# EAGLE board SP+SPIDER (EAGLE 9.4.2)
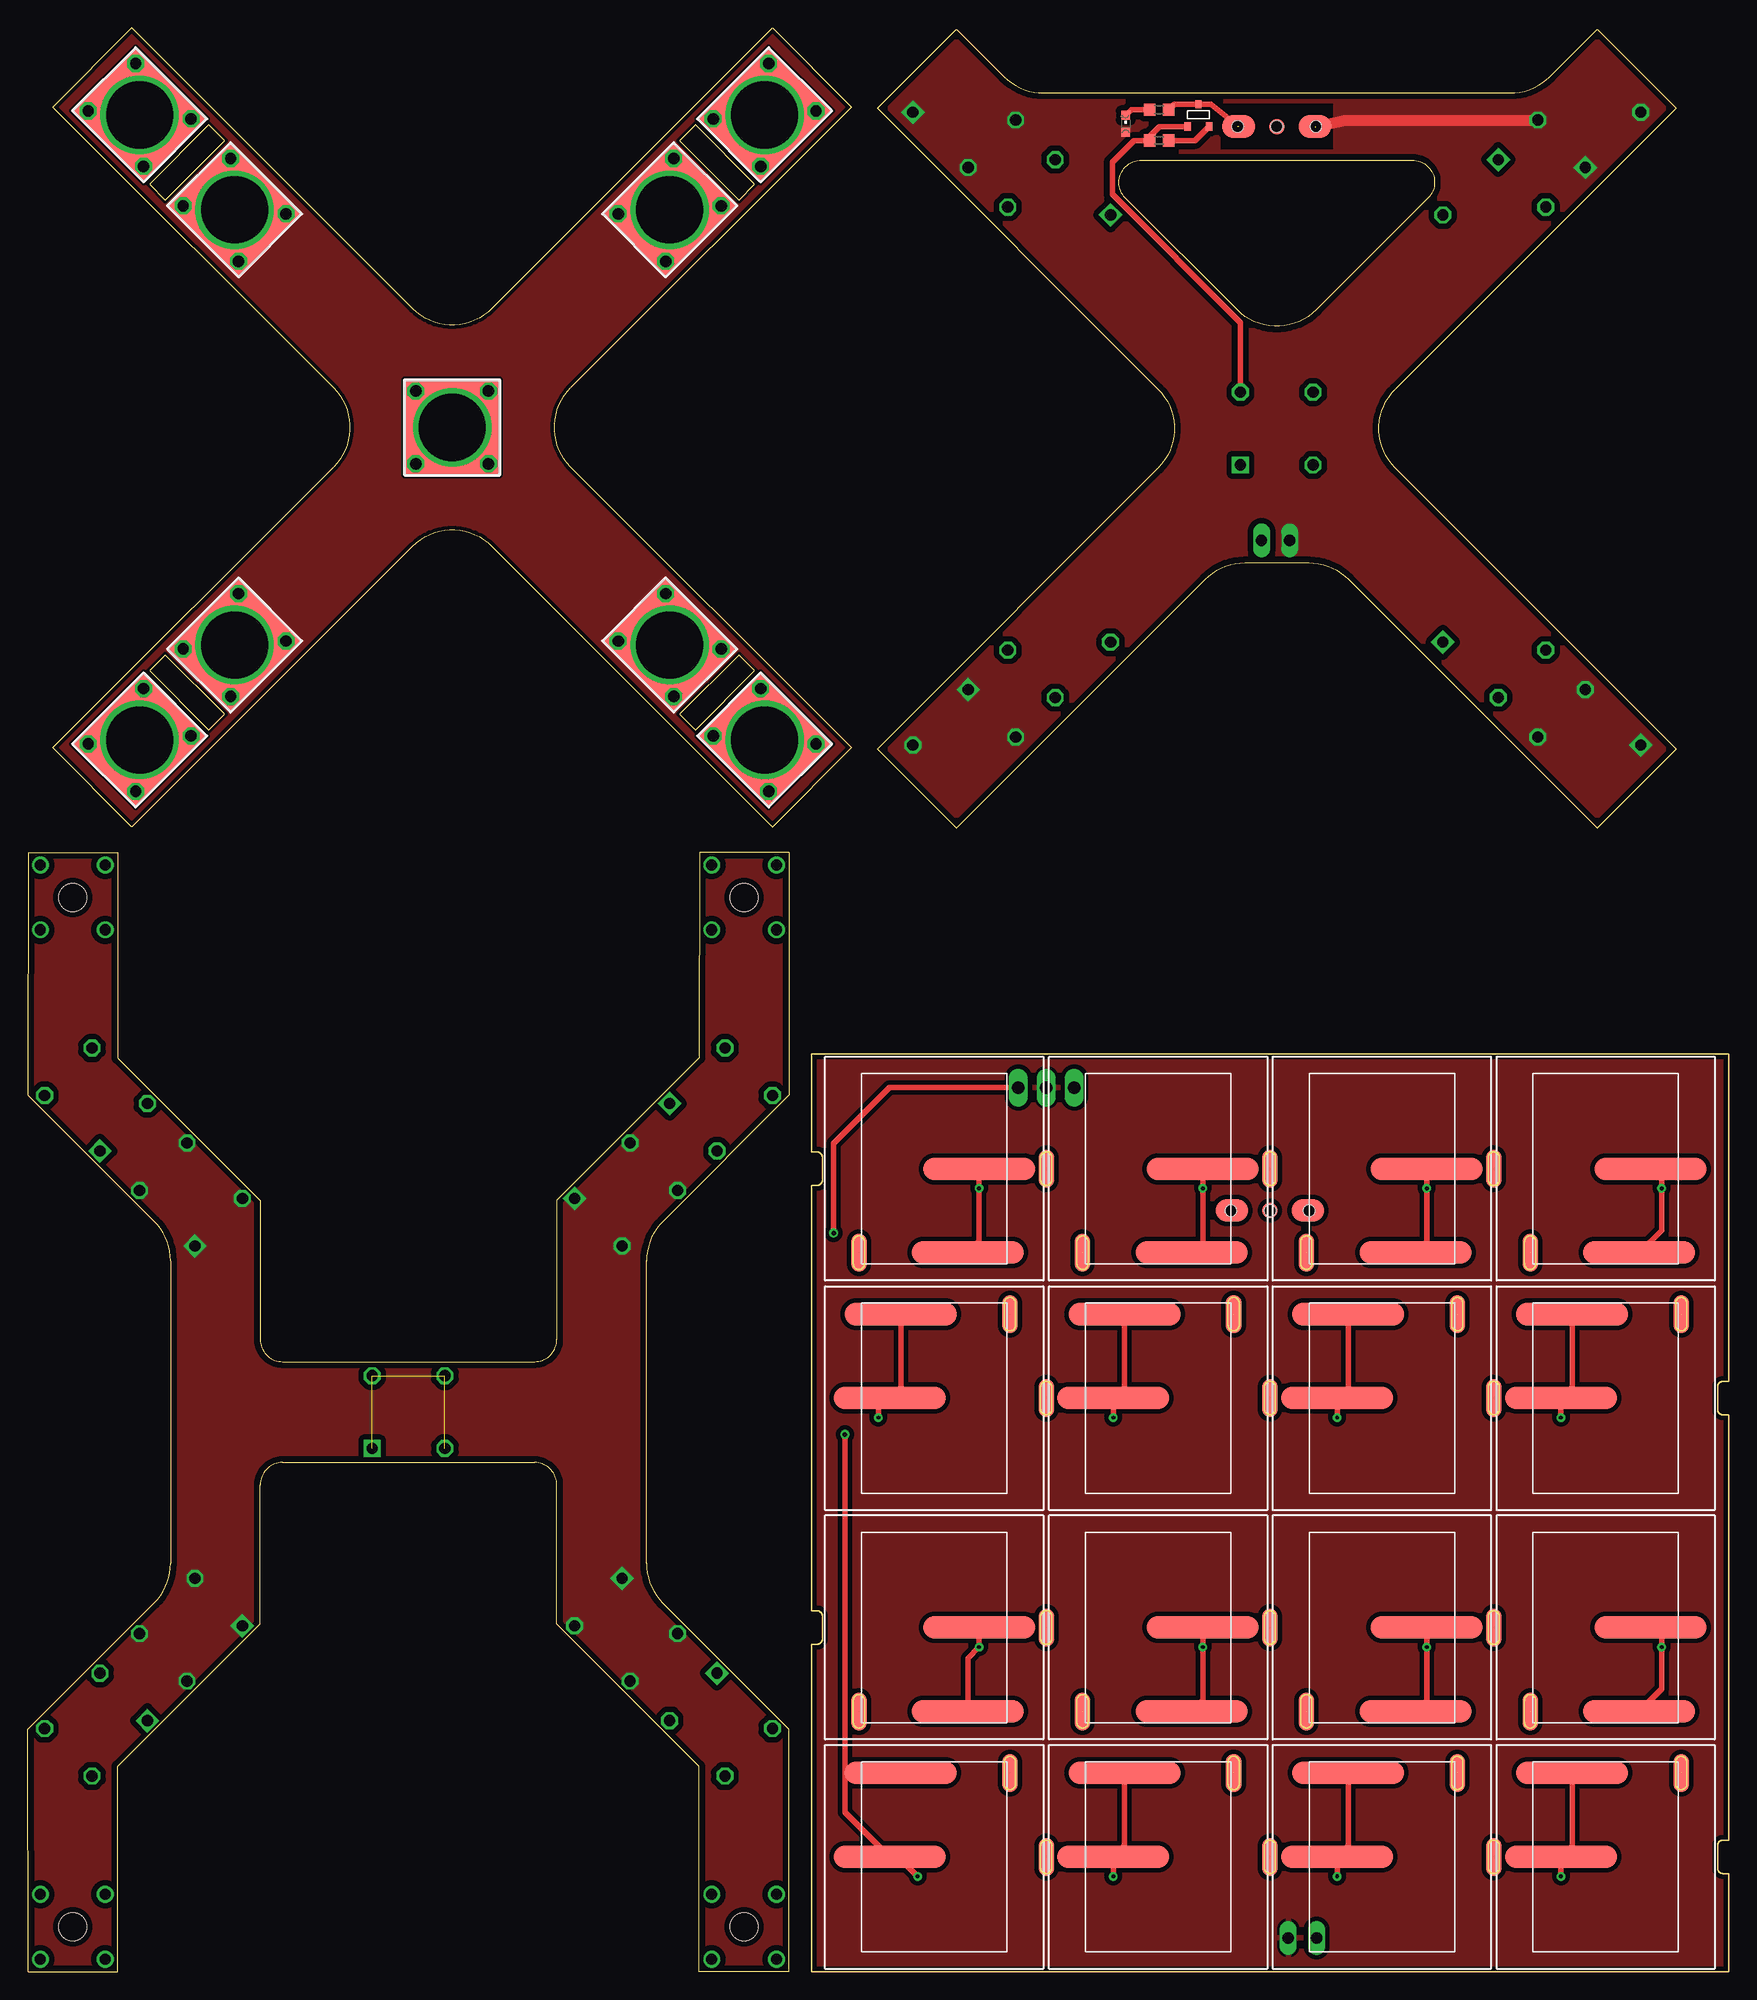
[diagram p0: board, top side]
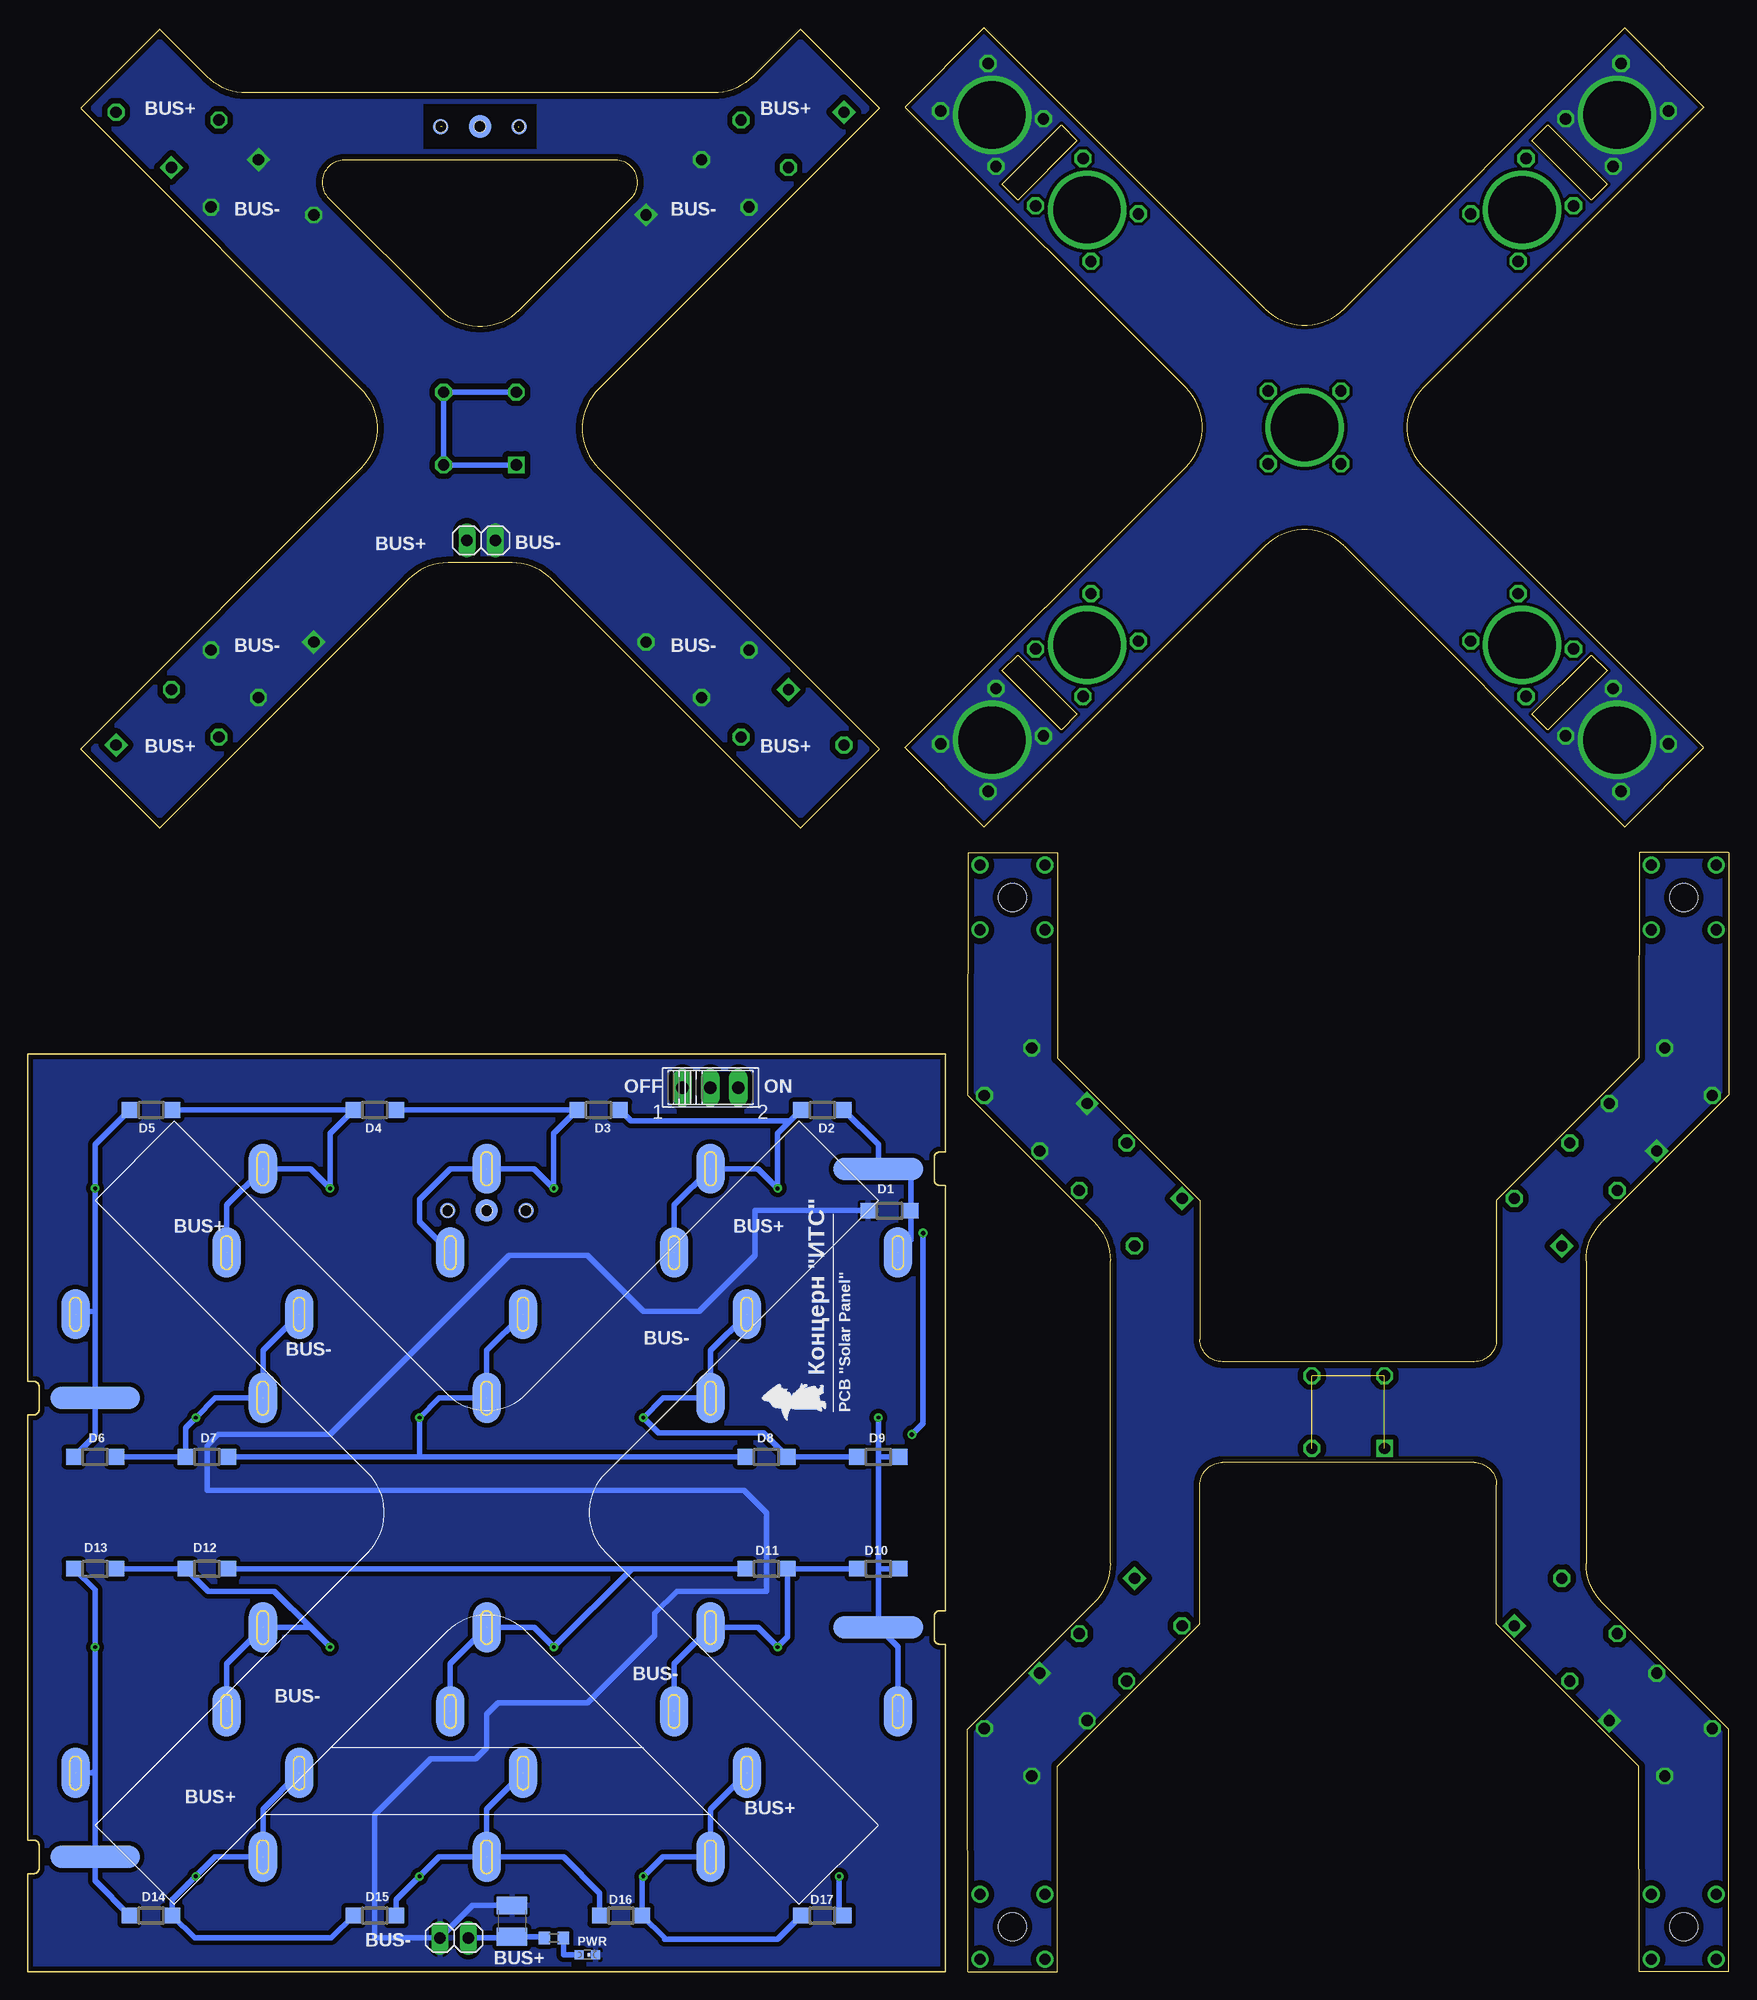
[diagram p1: board, bottom side, seen from below]

Size 152.01 x 173.7 mm. Coordinates in mm from the lower left corner, seen from the top.
Outline: 16.17,165.05 10.87,159.75 12.28,158.33 17.58,163.63 16.17,165.05
Outline: 10.87,116.26 16.17,110.95 17.58,112.37 12.28,117.67 10.87,116.26
Outline: 59.66,165.05 58.24,163.63 63.54,158.33 64.96,159.75 59.66,165.05
Outline: 58.24,112.37 59.66,110.95 64.96,116.26 63.54,117.67 58.24,112.37
Outline: 2.21,109.37 27.31,134.47 arc90 27.31,141.54 2.21,166.63 9.28,173.7 34.38,148.61 arc90 41.45,148.61 66.54,173.7 73.61,166.63 48.52,141.54 arc90 48.52,134.47 73.61,109.37 66.54,102.3 41.45,127.39 arc90 34.38,127.39 9.28,102.3 2.21,109.37
Outline: 75.91,109.27 101.01,134.37 arc90 101.01,141.44 75.91,166.53 82.98,173.6 87.23,169.36 arc45 90.76,167.9 132.47,167.9 arc45 136.01,169.37 140.24,173.6 147.31,166.53 122.22,141.44 arc90 122.22,134.37 147.31,109.27 140.24,102.2 118.01,124.44 arc45 114.47,125.9 108.75,125.9 arc45 105.22,124.44 82.98,102.2 75.91,109.27
Outline: 108.08,148.51 98.1,158.49 arc-135 99.52,161.9 123.72,161.9 arc-135 125.13,158.49 115.15,148.51 arc-90 108.08,148.51
Outline: 70.01,0 152.01,0 152.01,8.75 151.51,8.75 arc-90 151.01,9.25 151.01,11.25 arc-90 151.51,11.75 152.01,11.75 152.01,49.75 151.51,49.75 arc-90 151.01,50.25 151.01,52.25 arc-90 151.51,52.75 152.01,52.75 152.01,82 70.01,82 70.01,73.25 70.51,73.25 arc-90 71.01,72.75 71.01,70.75 arc-90 70.51,70.25 70.01,70.25 70.01,32.25 70.51,32.25 arc-90 71.01,31.75 71.01,29.75 arc-90 70.51,29.25 70.01,29.25 70.01,0
Outline: 0.01,0 8.01,0 8.02,18.34 20.77,31.09 20.76,43.5 arc-90 22.76,45.5 45.26,45.5 arc-90 47.26,43.5 47.26,31.08 59.99,18.34 59.99,0 68.01,0 68.03,21.66 56.73,32.95 arc-45 55.28,36.5 55.28,63.52 arc-45 56.74,67.06 68.02,78.34 68.01,100 60.01,100 60,81.66 47.25,68.91 47.26,56.5 arc-90 45.26,54.5 22.76,54.5 arc-90 20.76,56.5 20.77,68.91 8.02,81.66 8.01,100 0.01,100 0,78.34 11.29,67.06 arc-45 12.75,63.52 12.75,36.48 arc-45 11.29,32.94 0,21.66 0.01,0
Copper layers (1*16): Top 0.035mm / dielectric 1.5mm / Bottom 0.035mm
Design rules "default *": minimum track width 0.25mm, minimum drill 0.35mm, track to track 0.2mm, track to pad 0.2mm, pad to pad 0.2mm, via to via 0.2mm, smd to smd 0.2mm, copper to edge 0.2mm, drill to drill 0.2mm, minimum pad ring 10mil, minimum via ring 8mil, stop-mask expansion 4mil, vias tented up to drill 0mil, thermal gap 10mil
Holes 2.5 mm at 4.01,4 64.01,4 64.01,96 4.01,96

## Footprints (pad centres in the part's own frame; a part is rotated, then mirrored left to right if it is on the bottom)
R0603 = smd 1 x 1.1: 1 -0.85,0; 2 0.85,0
C1210 = smd 1.6 x 2.7: 1 -1.4,0; 2 1.4,0
SOD123 = smd 1.4 x 1.4: A 1.9,0; C -1.9,0
1X02 = drill 1.016 long: 1 -1.27,0; 2 1.27,0
CHIPLED_0603 = smd 0.8 x 0.8: A 0,-0.75; C 0,0.75
255SB = drill 1.118 long: 1 -2.5,0; 2 0,0; 3 2.5,0
SOLAR_0-2 = smd 2 x 10: IN 0,-4; IN-2 -7.5,-3 | smd 4.5 x 2.5 bottom: OUT 0,10; OUT-2 -7.5,6.75 | smd 3.4 x 1.4: OUT1 0,10; OUT-21 -7.5,6.75
SOLAR_1-2 = smd 2 x 10: IN 0,-4; IN-2 -7.5,-3 | smd 2 x 8 bottom: OUT 0,5 | smd 4.5 x 2.5 bottom: OUT-2 -7.5,6.75 | smd 3.4 x 1.4: OUT-21 -7.5,6.75
KCONNECT- = drill 1 pad 1.3 square: 1 -3,-3.5 | drill 1 pad 1.3 octagon: 2 -3,3.5; 3 3,-3.5; 4 3,3.5
KCONNECT-_QUAD = drill 1 pad 1.4 square: 1 -3.25,-3.25 | drill 1 pad 1.4 octagon: 2 -3.25,3.25; 3 3.25,-3.25; 4 3.25,3.25
GRAFIT4_2 = smd 2 x 2 bottom: OUT 0,0 | smd 2 x 2.9: P$1 0,3.4; P$2 0,-3.4 | smd 1.4 x 1.4: P$3 0,0 | smd 1.4 x 1.4 bottom: P$4 0,3.5; P$5 0,-3.5 | hole 1: 0,3.5; 0,0; 0,-3.5
KCONNECT = drill 1.016 octagon: 1 -3,-3.5; 2 -3,3.5; 3 3,-3.5; 4 3,3.5 | drill 6: P$1 0,0 | smd 8 x 9: P$2 0,0
KCONNECT_QUAD = drill 1.016 octagon: 1 -3.25,-3.25; 2 -3.25,3.25; 3 3.25,-3.25; 4 3.25,3.25 | drill 6: P$1 0,0 | smd 8.5 x 8.5: P$2 0,0
KCONNECT-3 = drill 1 pad 1.4 square: 1 -3,-3.5 | drill 1 pad 1.4 octagon: 2 -3,3.5; 4 3,3.5
KCONNECT-4 = drill 1 pad 1.4 square: 1 -3,-3.5 | drill 1 pad 1.4 octagon: 2 -3,3.5; 3 3,-3.5
KCONNECT-1 = drill 1 pad 1.4 octagon: 2 -3,3.5; 3 3,-3.5; 4 3,3.5
SOT23-3 = smd 0.56 x 0.73: 1 -0.95,-1; 2 0.95,-1; 3 0,1

## Placement (x,y rotation side)
2K7  2k7  [R0603]  105.01,3 0 bottom
C1  47µ  [C1210]  108.76,4.5 270 bottom
D1  MBR0520LT  [SOD123]  75.01,68 0 bottom
D2  MBR0520LT  [SOD123]  81.01,77 180 bottom
D3  MBR0520LT  [SOD123]  101.01,77 180 bottom
D4  MBR0520LT  [SOD123]  121.01,77 180 bottom
D5  MBR0520LT  [SOD123]  141.01,77 180 bottom
D6  MBR0520LT  [SOD123]  146.01,46 0 bottom
D7  MBR0520LT  [SOD123]  136.01,46 0 bottom
D8  MBR0520LT  [SOD123]  86.01,46 0 bottom
D9  MBR0520LT  [SOD123]  76.01,46 0 bottom
D10  MBR0520LT  [SOD123]  76.01,36 180 bottom
D11  MBR0520LT  [SOD123]  86.01,36 180 bottom
D12  MBR0520LT  [SOD123]  136.01,36 180 bottom
D13  MBR0520LT  [SOD123]  146.01,36 180 bottom
D14  MBR0520LT  [SOD123]  141.01,5 0 bottom
D15  MBR0520LT  [SOD123]  121.01,5 0 bottom
D16  MBR0520LT  [SOD123]  99.01,5 0 bottom
D17  MBR0520LT  [SOD123]  81.01,5 0 bottom
JP1  [1X02]  113.91,3 0 bottom
JP3  [1X02]  111.51,127.9 180 bottom
LED1  [CHIPLED_0603]  98.11,165.15 0 top
PWR  [CHIPLED_0603]  102.01,1.5 270 bottom
R1  1k5  [R0603]  101.11,166.4 0 top
R2  1M  [R0603]  101.11,163.65 0 top
S1  [255SB]  91.01,79 0 bottom
SOL1  SOLAR-2_0  [SOLAR_0-2]  81.01,10.25 270 top
SOL2  SOLAR-2_0  [SOLAR_0-2]  101.01,10.25 270 top
SOL3  SOLAR-2_0  [SOLAR_0-2]  121.01,10.25 270 top
SOL4  SOLAR-2_1  [SOLAR_1-2]  141.01,10.25 270 top
SOL5  SOLAR-2_0  [SOLAR_0-2]  141.01,30.75 90 top
SOL6  SOLAR-2_0  [SOLAR_0-2]  121.01,30.75 90 top
SOL7  SOLAR-2_0  [SOLAR_0-2]  101.01,30.75 90 top
SOL8  SOLAR-2_1  [SOLAR_1-2]  81.01,30.75 90 top
SOL9  SOLAR-2_0  [SOLAR_0-2]  81.01,51.25 270 top
SOL10  SOLAR-2_0  [SOLAR_0-2]  101.01,51.25 270 top
SOL11  SOLAR-2_0  [SOLAR_0-2]  121.01,51.25 270 top
SOL12  SOLAR-2_1  [SOLAR_1-2]  141.01,51.25 270 top
SOL13  SOLAR-2_0  [SOLAR_0-2]  141.01,71.75 90 top
SOL14  SOLAR-2_0  [SOLAR_0-2]  121.01,71.75 90 top
SOL15  SOLAR-2_0  [SOLAR_0-2]  101.01,71.75 90 top
SOL16  SOLAR-2_1  [SOLAR_1-2]  81.01,71.75 90 top
U$1  KCONNECT-  [KCONNECT-]  6.08,77.93 45 top
U$2  KCONNECT-  [KCONNECT-]  14.56,69.44 45 top
U$3  KCONNECT-  [KCONNECT-]  61.94,77.93 315 top
U$4  KCONNECT-  [KCONNECT-]  53.45,69.44 315 top
U$5  KCONNECTQUAD-  [KCONNECT-_QUAD]  34.01,50 0 top
U$6  GRAFITGRAFIT4_2  [GRAFIT4_2]  111.01,68 90 top
U$7  PCB "Solar Panel"  [ITS-LOGO]  80.01,50 90 bottom
U$17  KCONNECT  [KCONNECT]  9.98,165.93 225 top
U$18  KCONNECT-  [KCONNECT-]  6.08,22.07 135 top
U$19  KCONNECT-  [KCONNECT-]  14.56,30.55 135 top
U$20  KCONNECT-  [KCONNECT-]  61.94,22.07 225 top
U$21  KCONNECT-  [KCONNECT-]  53.45,30.55 225 top
U$22  KCONNECT  [KCONNECT]  9.98,110.07 315 top
U$23  KCONNECT  [KCONNECT]  18.47,118.56 315 top
U$24  KCONNECT  [KCONNECT]  18.47,157.45 45 top
U$25  KCONNECT  [KCONNECT]  65.84,110.07 45 top
U$26  KCONNECT  [KCONNECT]  57.36,118.56 225 top
U$27  KCONNECT  [KCONNECT]  65.84,165.93 135 top
U$28  KCONNECT  [KCONNECT]  57.36,157.45 315 top
U$29  KCONNECTQUAD  [KCONNECT_QUAD]  37.91,138 0 top
U$32  KCONNECT3  [KCONNECT-3]  83.68,165.83 135 bottom
U$33  KCONNECT3  [KCONNECT-3]  92.17,157.35 315 bottom
U$34  KCONNECT4  [KCONNECT-4]  139.54,165.83 45 bottom
U$35  KCONNECT4  [KCONNECT-4]  131.06,157.35 225 bottom
U$36  KCONNECT4  [KCONNECT-4]  83.68,109.97 225 bottom
U$37  KCONNECT1  [KCONNECT-1]  92.17,118.46 225 bottom
U$38  KCONNECT3  [KCONNECT-3]  139.54,109.97 315 bottom
U$39  KCONNECT3  [KCONNECT-3]  131.06,118.46 135 bottom
U$40  SI2302CDS  [SOT23-3]  104.61,165.9 0 top
U$41  GRAFITGRAFIT4_2  [GRAFIT4_2]  111.61,164.9 90 top
U$42  KCONNECTQUAD-  [KCONNECT-_QUAD]  111.61,137.9 0 top

## Library data of the parts
2K7 = rcl; SPICEPREFIX: R
C1 = rcl; SPICEPREFIX: C
D1-D17 = diode
JP1 JP3 = pinhead
LED1 PWR = led
R1 R2 = resistor
S1 SOL1-SOL16 U$1-U$7 U$17-U$29 U$32-U$42 = CanCubeSat

## Nets
1: R1.2 U$40.3 U$41.P$1 U$41.P$4
BUS+: U$1.1 U$1.2 U$1.3 U$1.4 U$3.1 U$3.2 U$3.3 U$3.4 U$18.1 U$18.2 U$18.3 U$18.4 U$20.1 U$20.2 U$20.3 U$20.4
BUS+1: 2K7.1 C1.2 JP1.2 S1.2
BUS+2: U$17.1 U$17.2 U$17.3 U$17.4 U$17.P$1 U$17.P$2 U$22.1 U$22.2 U$22.3 U$22.4 U$22.P$1 U$22.P$2 U$25.1 U$25.2 U$25.3 U$25.4 U$25.P$1 U$25.P$2 U$27.1 U$27.2 U$27.3 U$27.4 U$27.P$1 U$27.P$2
BUS+4: JP3.2 LED1.A U$32.1 U$32.2 U$32.4 U$34.1 U$34.2 U$34.3 U$36.1 U$36.2 U$36.3 U$38.1 U$38.2 U$38.4 U$41.P$2 U$41.P$5
BUS-: U$2.1 U$2.2 U$2.3 U$2.4 U$4.1 U$4.2 U$4.3 U$4.4 U$19.1 U$19.2 U$19.3 U$19.4 U$21.1 U$21.2 U$21.3 U$21.4
BUS-1: C1.1 D1.C JP1.1 PWR.C
BUS-3: JP3.1 U$33.1 U$33.2 U$33.4 U$35.1 U$35.2 U$35.3 U$37.2 U$37.3 U$37.4 U$39.1 U$39.2 U$39.4
CMD: U$5.1 U$5.2 U$5.3 U$5.4
CMD1: U$29.1 U$29.2 U$29.3 U$29.4 U$29.P$1 U$29.P$2
GND1: R2.2 U$40.2
N$1: D17.A S1.3 SOL1.IN SOL1.IN-2
N$2: U$23.1 U$23.2 U$23.3 U$23.4 U$23.P$1 U$23.P$2 U$24.1 U$24.2 U$24.3 U$24.4 U$24.P$1 U$24.P$2 U$26.1 U$26.2 U$26.3 U$26.4 U$26.P$1 U$26.P$2 U$28.1 U$28.2 U$28.3 U$28.4 U$28.P$1 U$28.P$2
N$3: D16.A D17.C SOL1.OUT SOL1.OUT1 SOL1.OUT-2 SOL1.OUT-21 SOL2.IN SOL2.IN-2
N$8: D15.A D16.C SOL2.OUT SOL2.OUT1 SOL2.OUT-2 SOL2.OUT-21 SOL3.IN SOL3.IN-2
N$9: D14.A D15.C SOL3.OUT SOL3.OUT1 SOL3.OUT-2 SOL3.OUT-21 SOL4.IN SOL4.IN-2
N$22: D12.A D13.C SOL5.OUT SOL5.OUT1 SOL5.OUT-2 SOL5.OUT-21 SOL6.IN SOL6.IN-2
N$23: D11.A D12.C SOL6.OUT SOL6.OUT1 SOL6.OUT-2 SOL6.OUT-21 SOL7.IN SOL7.IN-2
N$24: D13.A D14.C SOL4.OUT SOL4.OUT-2 SOL4.OUT-21 SOL5.IN SOL5.IN-2
N$25: D10.A D11.C SOL7.OUT SOL7.OUT1 SOL7.OUT-2 SOL7.OUT-21 SOL8.IN SOL8.IN-2
N$26: D9.A D10.C SOL8.OUT SOL8.OUT-2 SOL8.OUT-21 SOL9.IN SOL9.IN-2
N$27: D8.A D9.C SOL9.OUT SOL9.OUT1 SOL9.OUT-2 SOL9.OUT-21 SOL10.IN SOL10.IN-2
N$28: D7.A D8.C SOL10.OUT SOL10.OUT1 SOL10.OUT-2 SOL10.OUT-21 SOL11.IN SOL11.IN-2
N$29: D6.A D7.C SOL11.OUT SOL11.OUT1 SOL11.OUT-2 SOL11.OUT-21 SOL12.IN SOL12.IN-2
N$30: D5.A D6.C SOL12.OUT SOL12.OUT-2 SOL12.OUT-21 SOL13.IN SOL13.IN-2
N$31: D4.A D5.C SOL13.OUT SOL13.OUT1 SOL13.OUT-2 SOL13.OUT-21 SOL14.IN SOL14.IN-2
N$32: D3.A D4.C SOL14.OUT SOL14.OUT1 SOL14.OUT-2 SOL14.OUT-21 SOL15.IN SOL15.IN-2
N$33: D2.A D3.C SOL15.OUT SOL15.OUT1 SOL15.OUT-2 SOL15.OUT-21 SOL16.IN SOL16.IN-2
N$34: D1.A D2.C SOL16.OUT SOL16.OUT-2 SOL16.OUT-21
N$35: 2K7.2 PWR.A
N$37: LED1.C R1.1
ROZE1: R2.1 U$40.1 U$42.1 U$42.2 U$42.3 U$42.4

## Tracks (layer width: path | path; a pad name or v marks a point on that pad's centre or on a via)
1  (1 unrouted)
  Top 0.5: R1.2 102.46,166.9 U$40.3 105.71,166.9 U$41.P$1
BUS+
  pour Bottom (isolate 0.5, no thermals): 0.01,100 8.01,100 8.01,83.5 8.13,82.5 8.51,81.5 9.18,80.48 34.04,55.7 58.85,80.47 59.45,81.44 59.88,82.5 60.01,83.47 60.02,99.99 68.01,99.99 68.01,78.33 56.47,66.81 56.9,32.76 68.03,21.63 68,0.01 60.01,0 60.01,16.48 59.85,17.58 59.35,18.77 58.79,19.56 34.19,44.11 21.28,31.61 9.11,19.43 8.68,18.75 8.35,18.07 8.09,17.07 8.01,16.38 8.01,0 0.03,-0.01 0.01,19.48 0.01,21.63 1.62,23.27 3.13,24.76 11.8,33.44 11.62,66.75 1.27,77.1 0.01,78.34
BUS+1
  Bottom 0.5: JP1.2 108.86,3 C1.2 105.96,3.1 2K7.1
  pour Top (isolate 0.4): 151.96,0.2 151.96,82.1 70.31,82.1 70.31,0.2
BUS+2
  pour Bottom (isolate 0.3, no thermals): 1.83,174.1 1.83,101.99 74.08,101.99 74.08,174.1
BUS+4  (1 unrouted)
  Top 1: U$34.3 134.87,165.4 117.51,165.4 U$41.P$2
  pour Top (isolate 0.5, no thermals): 147.61,102.4 147.61,173.3 76.21,173.3 76.21,102.4
  cutout Top: 106.61,166.9 106.61,162.9 116.61,162.9 116.61,166.9
BUS-
  pour Top (isolate 0.5, no thermals): 0.01,100 8.01,100 8.01,83.5 8.13,82.5 8.51,81.5 9.18,80.48 34.04,55.7 58.85,80.47 59.82,82.04 60.01,83.47 60.02,99.99 68.01,99.99 68.01,78.33 56.18,66.5 56.41,63.55 56.41,33.25 68.01,21.65 68.01,0.01 60.01,0 60.01,16.48 59.85,17.58 59.35,18.77 58.79,19.56 45.8,32.52 34.2,44.12 21.28,31.61 9.11,19.43 8.68,18.75 8.35,18.07 8.09,17.07 8.01,16.38 8.01,0 0.03,-0.01 0.01,19.48 0.01,21.63 1.62,23.27 3.13,24.76 11.77,33.41 11.77,66.59 1.27,77.1 0.01,78.34
BUS-1
  Bottom 0.5: D1.C 87.01,68 87.01,64 92.01,59 97.01,59 102.01,64 109.01,64 125.01,48 135.01,48 136.01,47 136.01,43 88.01,43 86.01,41 86.01,34 94.01,34 96.01,32 96.01,30 102.01,24 110.01,24 111.01,23 111.01,20 112.01,19 116.01,19 121.01,14 121.01,3 JP1.1 | 115.01,3 JP1.1 | JP1.1 112.28,5.9 C1.1
  pour Bottom (isolate 0.4): 70.16,0.3 151.71,0.3 151.71,82.3 70.16,82.3
BUS-3
  pour Bottom (isolate 0.5, no thermals): 76.31,102.5 147.61,102.5 147.61,173.5 76.31,173.5
  cutout Bottom: 106.61,166.9 106.61,162.9 116.61,162.9 116.61,166.9
CMD  (3 unrouted)
CMD1
  Top 0.8: U$29.P$1 U$29.1 | U$29.P$1 40.91,135 U$29.3 | U$29.P$1 34.91,141 U$29.2 | U$29.4 U$29.P$1
GND1
  Top 0.5: R2.2 104.31,163.65 U$40.2
N$1  (via drill 0.35, 0.4)
  Top 0.5: v79.51,8.5 78.01,10 77.01,10 SOL1.IN 73.01,14.25 73.01,18 | 73.01,18 v73.01,48 | v72.01,66 72.01,74 77.01,79 S1.3 | SOL1.IN-2 73.26,17.75 73.01,18
  Bottom 0.5: D17.A 79.51,5.4 v79.51,8.5 | v72.01,66 72.01,49 v73.01,48
N$2
  pour Top (isolate 0.3, no thermals): 1.83,174.1 1.83,101.99 74.08,101.99 74.08,174.1
N$3  (via drill 0.35)  (2 unrouted)
  Top 0.5: v97.01,8.5 SOL2.IN 98.01,11.25 SOL2.IN-2
  Bottom 0.5: D17.C 85.04,2.87 95.11,2.87 95.11,3 D16.A 97.11,8.4 v97.01,8.5 95.26,10.25 SOL1.OUT1 91.01,14.5 SOL1.OUT-21
N$4  (via drill 1)
  other vias: 1.11,6.9
N$5  (via drill 1)
  other vias: 1.11,1.1
N$6  (via drill 1)
  other vias: 6.91,1.1
N$7  (via drill 1)
  other vias: 6.91,6.9
N$8  (via drill 0.35)  (2 unrouted)
  Top 0.5: v117.01,8.5 SOL3.IN 118.01,11.25 SOL3.IN-2
  Bottom 0.5: D15.A 119.11,6.4 v117.01,8.5 115.26,10.25 SOL2.OUT1 | D16.C 100.91,7 104.16,10.25 SOL2.OUT1 | SOL2.OUT1 111.01,14.5 SOL2.OUT-21
N$9  (via drill 0.35)  (2 unrouted)
  Top 0.5: v137.01,8.5 SOL4.IN 138.01,11.25 SOL4.IN-2
  Bottom 0.5: D15.C 124.91,3 137.11,3 D14.A 139.11,6.4 v137.01,8.5 135.26,10.25 SOL3.OUT1 131.01,14.5 SOL3.OUT-21
N$10  (via drill 1)
  other vias: 61.11,6.9
N$11  (via drill 1)
  other vias: 61.11,1.1
N$12  (via drill 1)
  other vias: 66.91,1.1
N$13  (via drill 1)
  other vias: 66.91,6.9
N$14  (via drill 1)
  other vias: 61.11,98.9
N$15  (via drill 1)
  other vias: 61.11,93.1
N$16  (via drill 1)
  other vias: 66.91,93.1
N$17  (via drill 1)
  other vias: 66.91,98.9
N$18  (via drill 1)
  other vias: 1.11,98.9
N$19  (via drill 1)
  other vias: 1.11,93.1
N$20  (via drill 1)
  other vias: 6.91,93.1
N$21  (via drill 1)
  other vias: 6.91,98.9
N$22  (via drill 0.35)  (2 unrouted)
  Top 0.5: SOL6.IN v125.01,29 125.01,24.25 SOL6.IN-2
  Bottom 0.5: 126.76,30.75 SOL5.OUT1 134.26,27.5 SOL5.OUT-21 | 126.76,30.75 v125.01,29 | 126.76,30.75 130.01,34 135.91,34 D12.A D13.C
N$23  (via drill 0.35)  (2 unrouted)
  Top 0.5: SOL7.IN v105.01,29 105.01,24.25 SOL7.IN-2
  Bottom 0.5: D11.A 98.01,36 | 98.01,36 v105.01,29 106.76,30.75 SOL6.OUT1 114.26,27.5 SOL6.OUT-21 | D12.C 98.01,36
N$24  (via drill 0.35)  (1 unrouted)
  Top 0.5: SOL5.IN 145.01,30.5 146.01,30.5 v146.01,29 146.01,25.25 SOL5.IN-2
  Bottom 0.5: 146.01,18 v146.01,29 146.01,34.1 D13.A | 146.01,18 SOL4.OUT 146.01,8.1 D14.C | SOL4.OUT-21 146.26,17.75 146.01,18
N$25  (via drill 0.35)  (2 unrouted)
  Top 0.5: SOL8.IN v85.01,29 84.01,28 SOL8.IN-2
  Bottom 0.5: D10.A D11.C 84.11,29.9 v85.01,29 86.76,30.75 SOL7.OUT1 94.26,27.5 SOL7.OUT-21
N$26  (via drill 0.35)  (1 unrouted)
  Top 0.5: v76.01,49.5 76.01,51 77.01,51 | 77.01,51 SOL9.IN | SOL9.IN-2 78.01,52 77.01,51
  Bottom 0.5: v76.01,49.5 76.01,46 | 76.01,46 76.01,36 | 76.01,36 SOL8.OUT 74.26,29 SOL8.OUT-21 | D9.A 76.01,46 | D10.C 76.01,36
N$27  (via drill 0.35)  (2 unrouted)
  Top 0.5: SOL10.IN 97.01,51 | 97.01,51 v97.01,49.5 | SOL10.IN-2 98.01,52 97.01,51
  Bottom 0.5: D9.C D8.A 86.26,48.15 95.66,48.15 v97.01,49.5 95.26,51.25 SOL9.OUT1 91.01,55.5 SOL9.OUT-21
N$28  (via drill 0.35)  (2 unrouted)
  Top 0.5: SOL11.IN 117.01,51 | 117.01,51 v117.01,49.5 | SOL11.IN-2 118.01,52 117.01,51
  Bottom 0.5: D8.C 117.01,46 | 117.01,46 D7.A | 117.01,46 v117.01,49.5 115.26,51.25 SOL10.OUT1 111.01,55.5 SOL10.OUT-21
N$29  (via drill 0.35)  (2 unrouted)
  Top 0.5: v137.01,49.5 SOL12.IN 138.01,52.25 SOL12.IN-2
  Bottom 0.5: D6.A D7.C 137.91,48.6 v137.01,49.5 135.26,51.25 SOL11.OUT1 131.01,55.5 SOL11.OUT-21
N$30  (via drill 0.35)  (1 unrouted)
  Top 0.5: SOL13.IN 145.01,71.5 146.01,71.5 v146.01,70 146.01,66.25 SOL13.IN-2
  Bottom 0.5: 146.01,59 v146.01,70 146.01,73.9 D5.A | 146.01,59 SOL12.OUT 146.01,47.9 D6.C | SOL12.OUT-21 147.51,59 146.01,59
N$31  (via drill 0.35)  (2 unrouted)
  Top 0.5: SOL14.IN v125.01,70 125.01,65.25 SOL14.IN-2
  Bottom 0.5: D5.C D4.A 125.01,74.9 v125.01,70 126.76,71.75 SOL13.OUT1 134.26,68.5 SOL13.OUT-21
N$32  (via drill 0.35)  (2 unrouted)
  Top 0.5: SOL15.IN v105.01,70 105.01,65 104.01,64 103.01,64 103.26,64.25 SOL15.IN-2
  Bottom 0.5: D4.C D3.A 105.01,74.9 v105.01,70 106.76,71.75 SOL14.OUT1 114.26,71.75 117.01,69 117.01,67 SOL14.OUT-21
N$33  (via drill 0.35)  (2 unrouted)
  Top 0.5: SOL16.IN v85.01,70 85.01,65.25 SOL16.IN-2
  Bottom 0.5: D3.C 98.11,76 83.91,76 D2.A 85.01,74.9 v85.01,70 86.76,71.75 SOL15.OUT1 94.26,68.5 SOL15.OUT-21
N$34  (1 unrouted)
  Bottom 0.5: D2.C 76.01,73.9 SOL16.OUT 73.11,71.75 D1.A 73.11,65.4 SOL16.OUT-21
N$35
  Bottom 0.5: PWR.A 104.16,1.5 2K7.2
N$37
  Top 0.5: LED1.C 98.61,166.4 R1.1
ROZE1
  Top 0.5: U$42.2 108.36,147.37 96.91,158.82 96.91,161.7 98.86,163.65 R2.1 100.26,164.05 101.11,164.9 U$40.1
  Bottom 0.5: U$42.2 U$42.4 U$42.3 U$42.1

## Text on the board
bNames: BUS+ | BUS+ | BUS- | BUS- | BUS- | BUS+ | BUS- | BUS- | BUS+ | BUS+ | ON | OFF | BUS+ | BUS+ | BUS- | BUS- | BUS- | BUS- | BUS+ | BUS+ | BUS- | BUS+